# EAGLE board front (EAGLE 7.7.0)

Size 138 x 100 mm. Coordinates in mm from the lower left corner, seen from the top.
Outline: 128,80.5 128,10.5 arc-90 127.5,10 10.5,10 arc-90 10,10.5 10,80.5 arc-90 10.5,81 127.5,81 arc-90 128,80.5
Outline: 3,100 135,100 arc-90 138,97 138,3 arc-90 135,0 3,0 arc-90 0,3 0,97 arc-90 3,100
Outline: 20,20 27,20 27,17 33,17 33,20 47,20 47,17 53,17 53,20 67,20 67,17 73,17 73,20 87,20 87,17 93,17 93,20 107,20 107,17 113,17 113,20 120,20 120,70 113,70 113,73 107,73 107,70 93,70 93,73 87,73 87,70 73,70 73,73 67,73 67,70 53,70 53,73 47,73 47,70 33,70 33,73 27,73 27,70 20,70 20,20
Copper layers (1*16): Top 0.035mm / dielectric 1.5mm / Bottom 0.035mm
Design rules "default": minimum track width 10mil, minimum drill 24mil, track to track 8mil, track to pad 8mil, pad to pad 8mil, via to via 8mil, smd to smd 8mil, copper to edge 40mil, drill to drill 8mil, minimum pad ring 10mil, minimum via ring 8mil, stop-mask expansion 4mil, vias tented up to drill 0mil, thermal gap 10mil
Holes 2.2 mm at 4,96 4,4 134,4 134,96 33,96 105,96 48,3 93,3 4,48 134,48

## Footprints (pad centres in the part's own frame; a part is rotated, then mirrored left to right if it is on the bottom)
CAMERA-BOARD = hole 2.2: 1.25,7.5; 50.75,7.5 | hole 12: 14,7.5 | hole 5: 45,7.5

## Placement (x,y rotation side)
U$2  CAMERA-BOARD  [CAMERA-BOARD]  95,84 0 bottom
U$3  5INCH-DISPLAY-GUIDENOHOLE  [5INCH-DISP-NOHOLE]  8,5 0 top

## Library data of the parts
U$2 U$3 = 0-chirimen